# Altium PCB AIRZAI_LID_BD_REVA.PcbDoc (part 1 of 2)
Units mil, origin at the board's own origin, x right, y up, seen from the top; angles counter-clockwise.
Board outline 3392.82 x 2969.83 mil, 4 copper layers (Top, GND, PWR, Bottom), stack 30.709 mil thick; 77 components, 60 nets, 278 pads, 262 vias.
Unrouted connection lines stored in the file: 140.
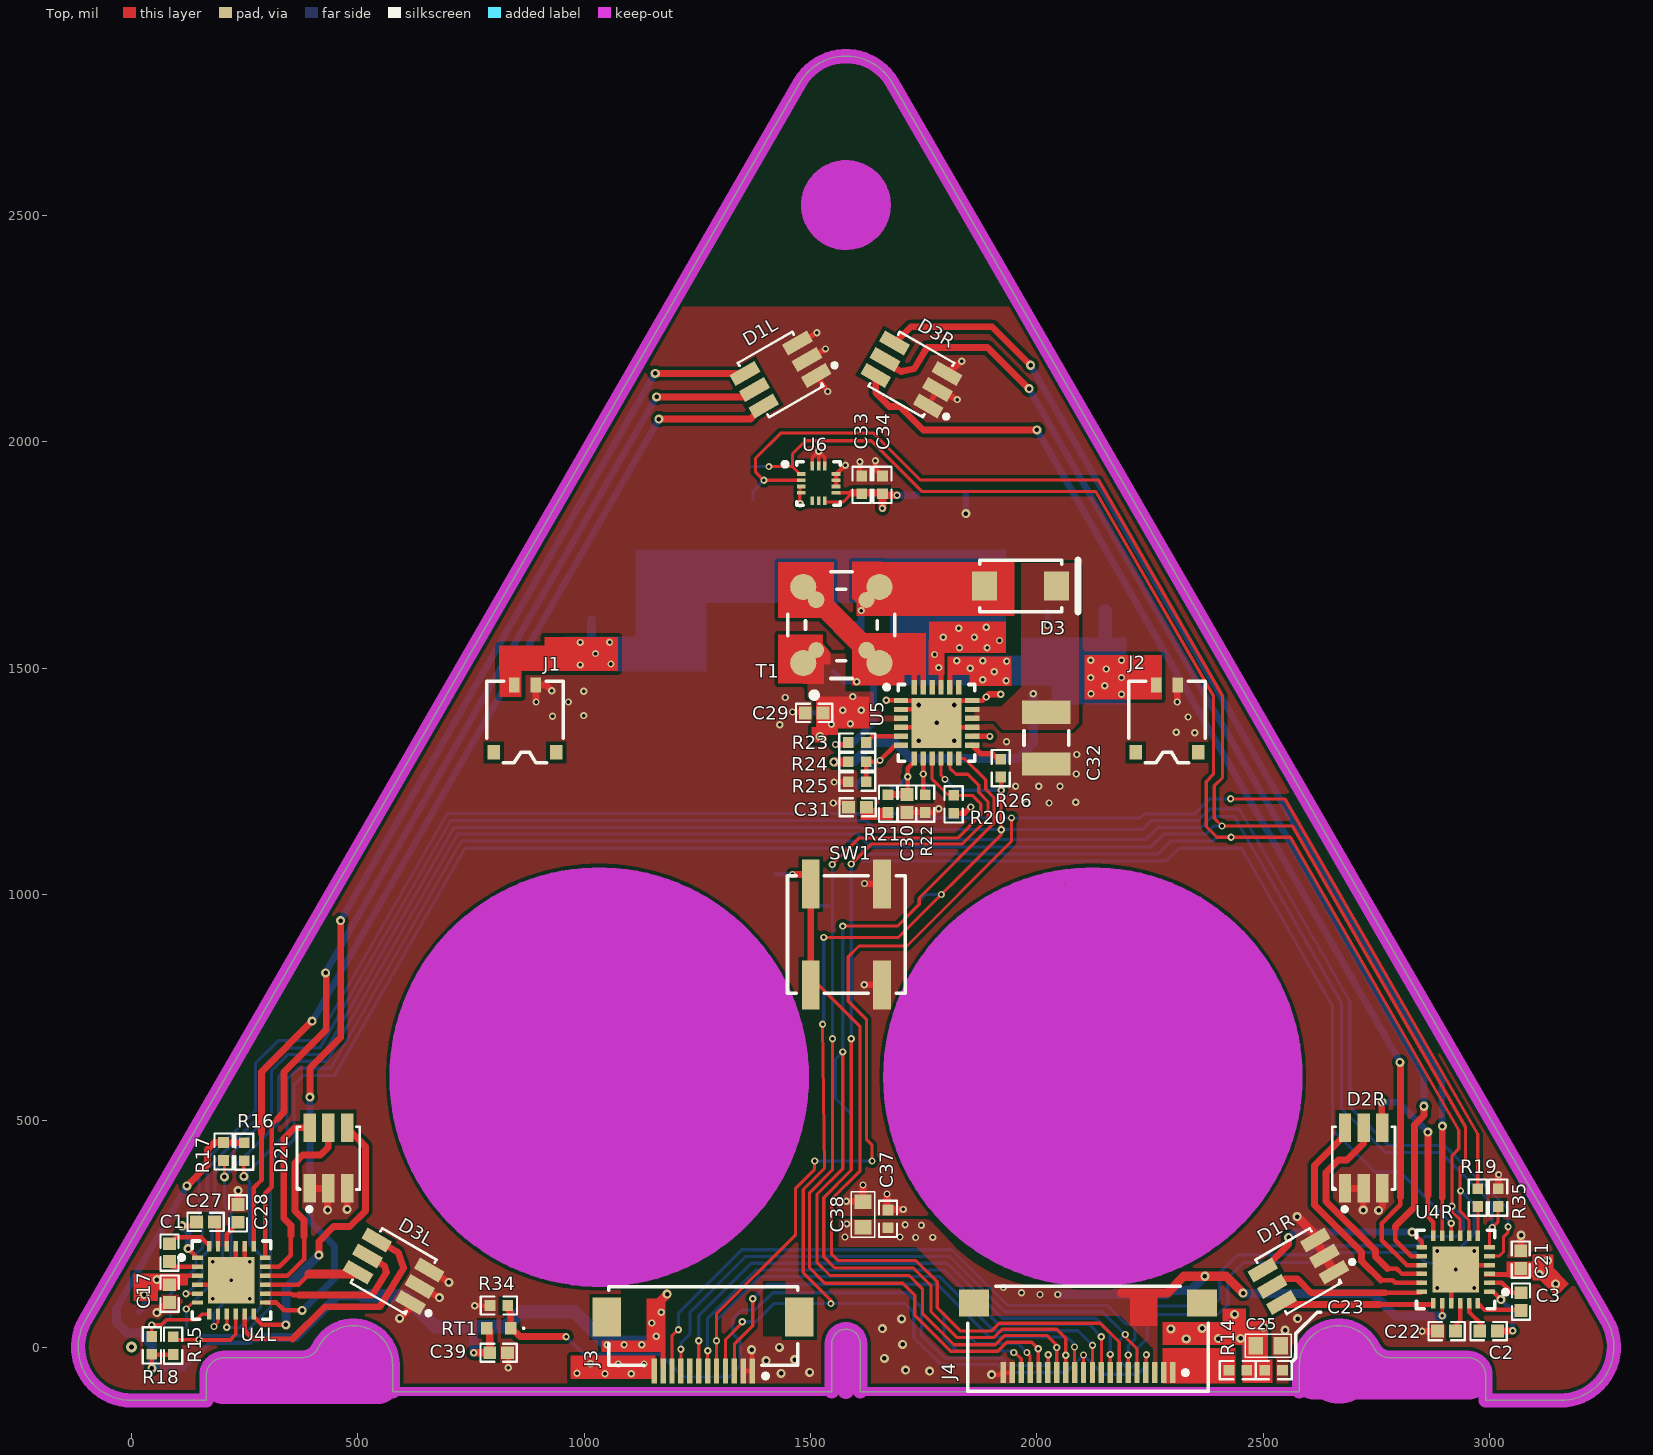
[diagram p0: Top view]
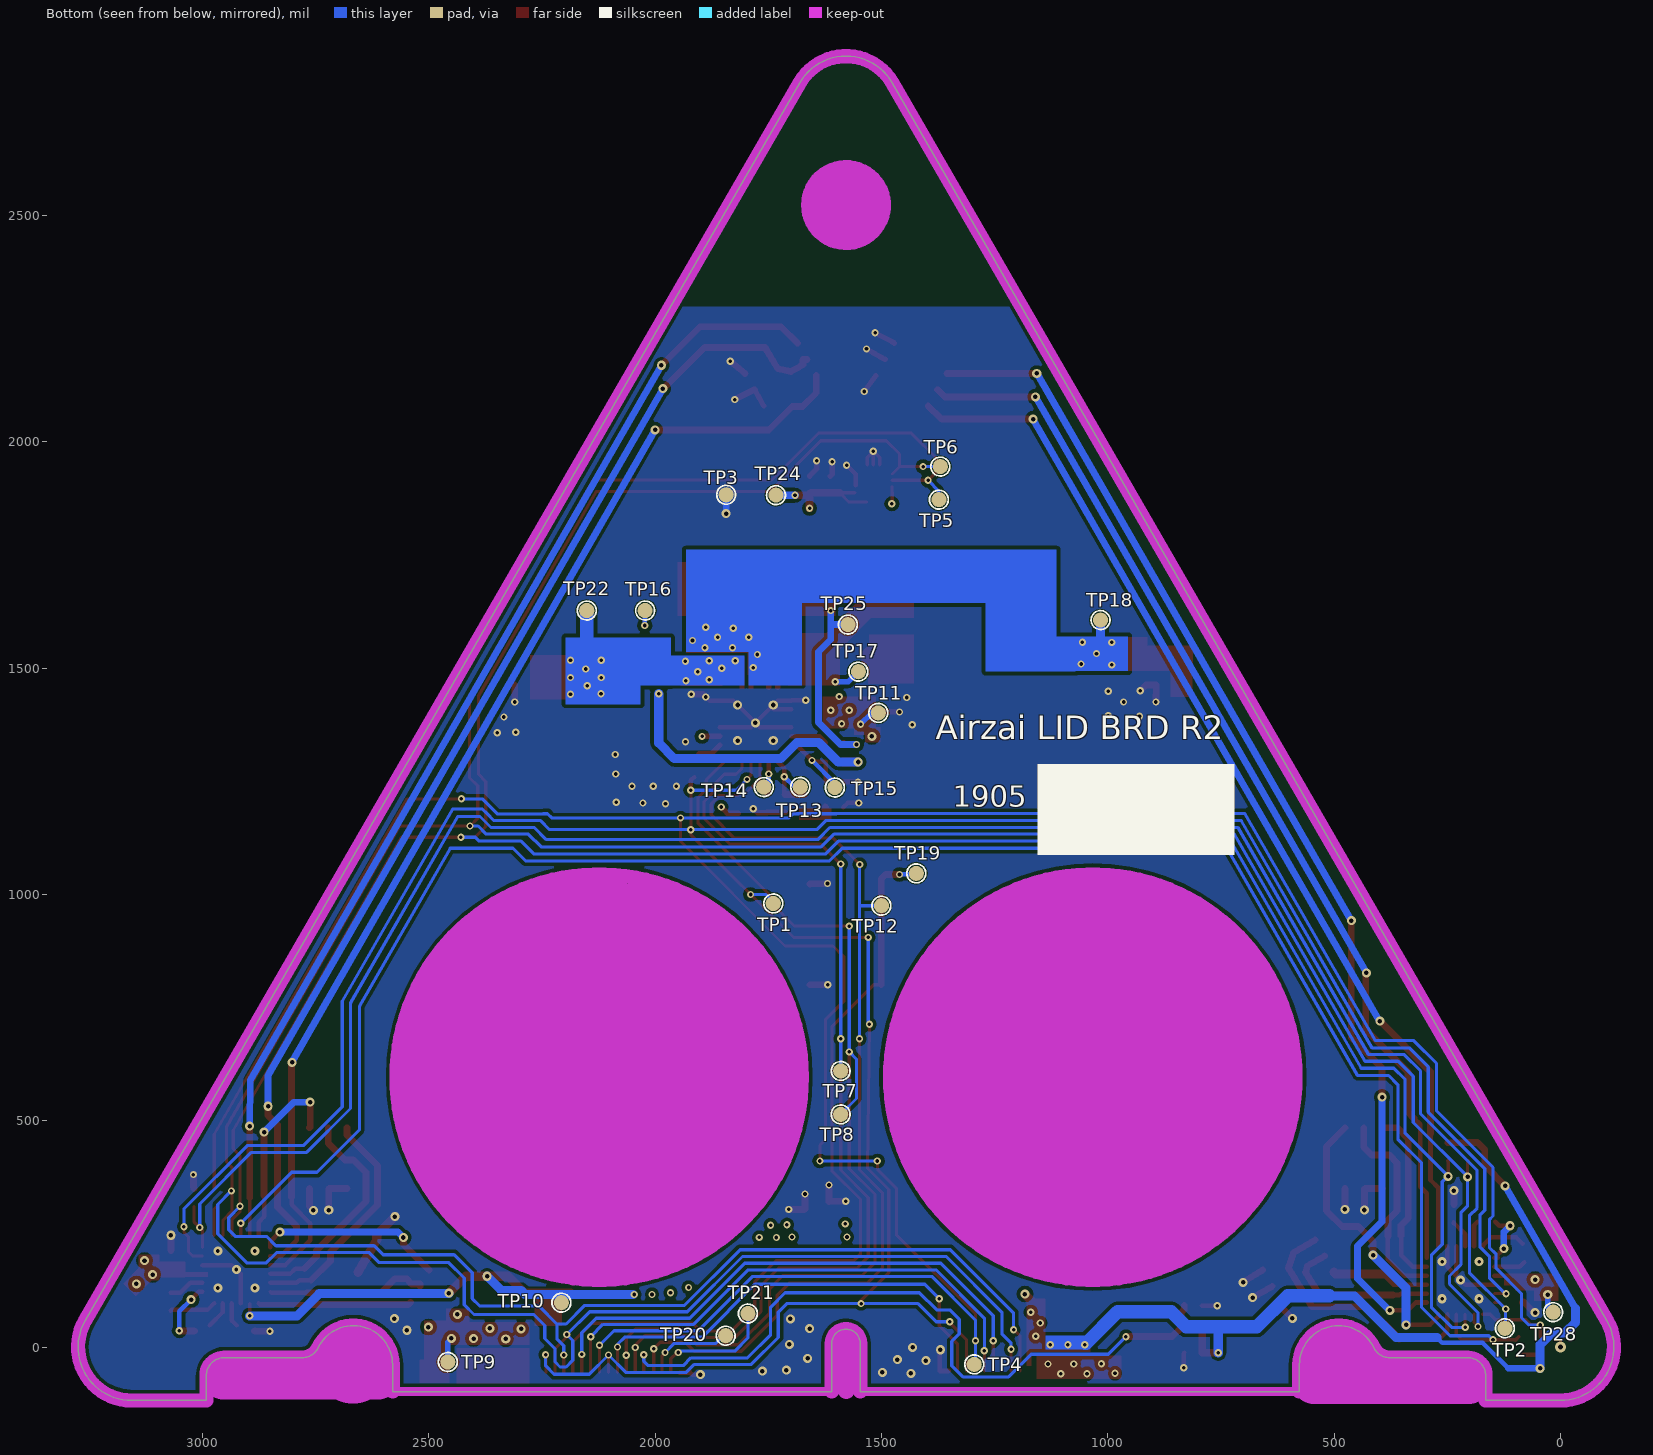
[diagram p1: Bottom view, seen from below]
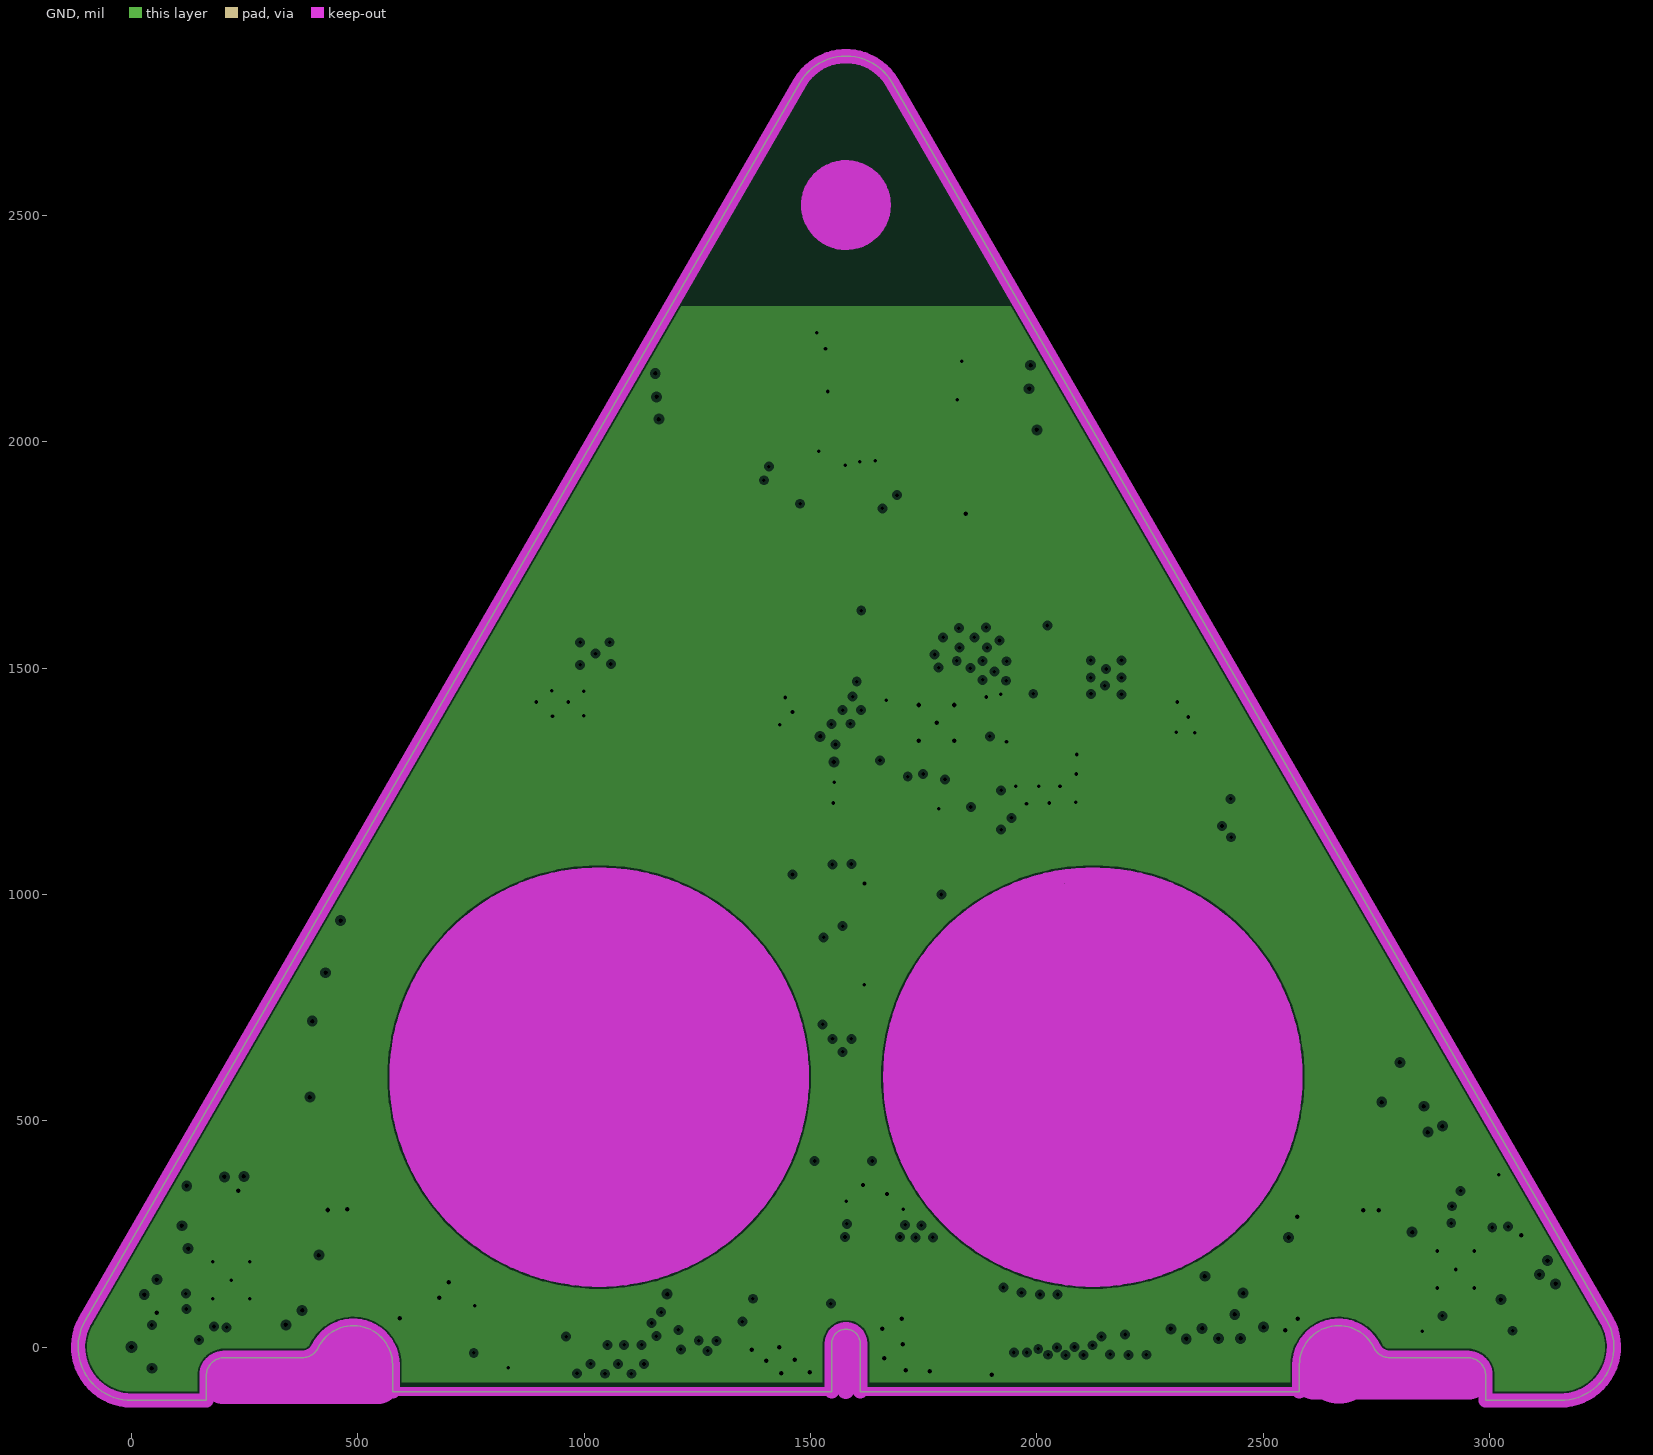
[diagram p2: GND, clearances drawn from the general rule]
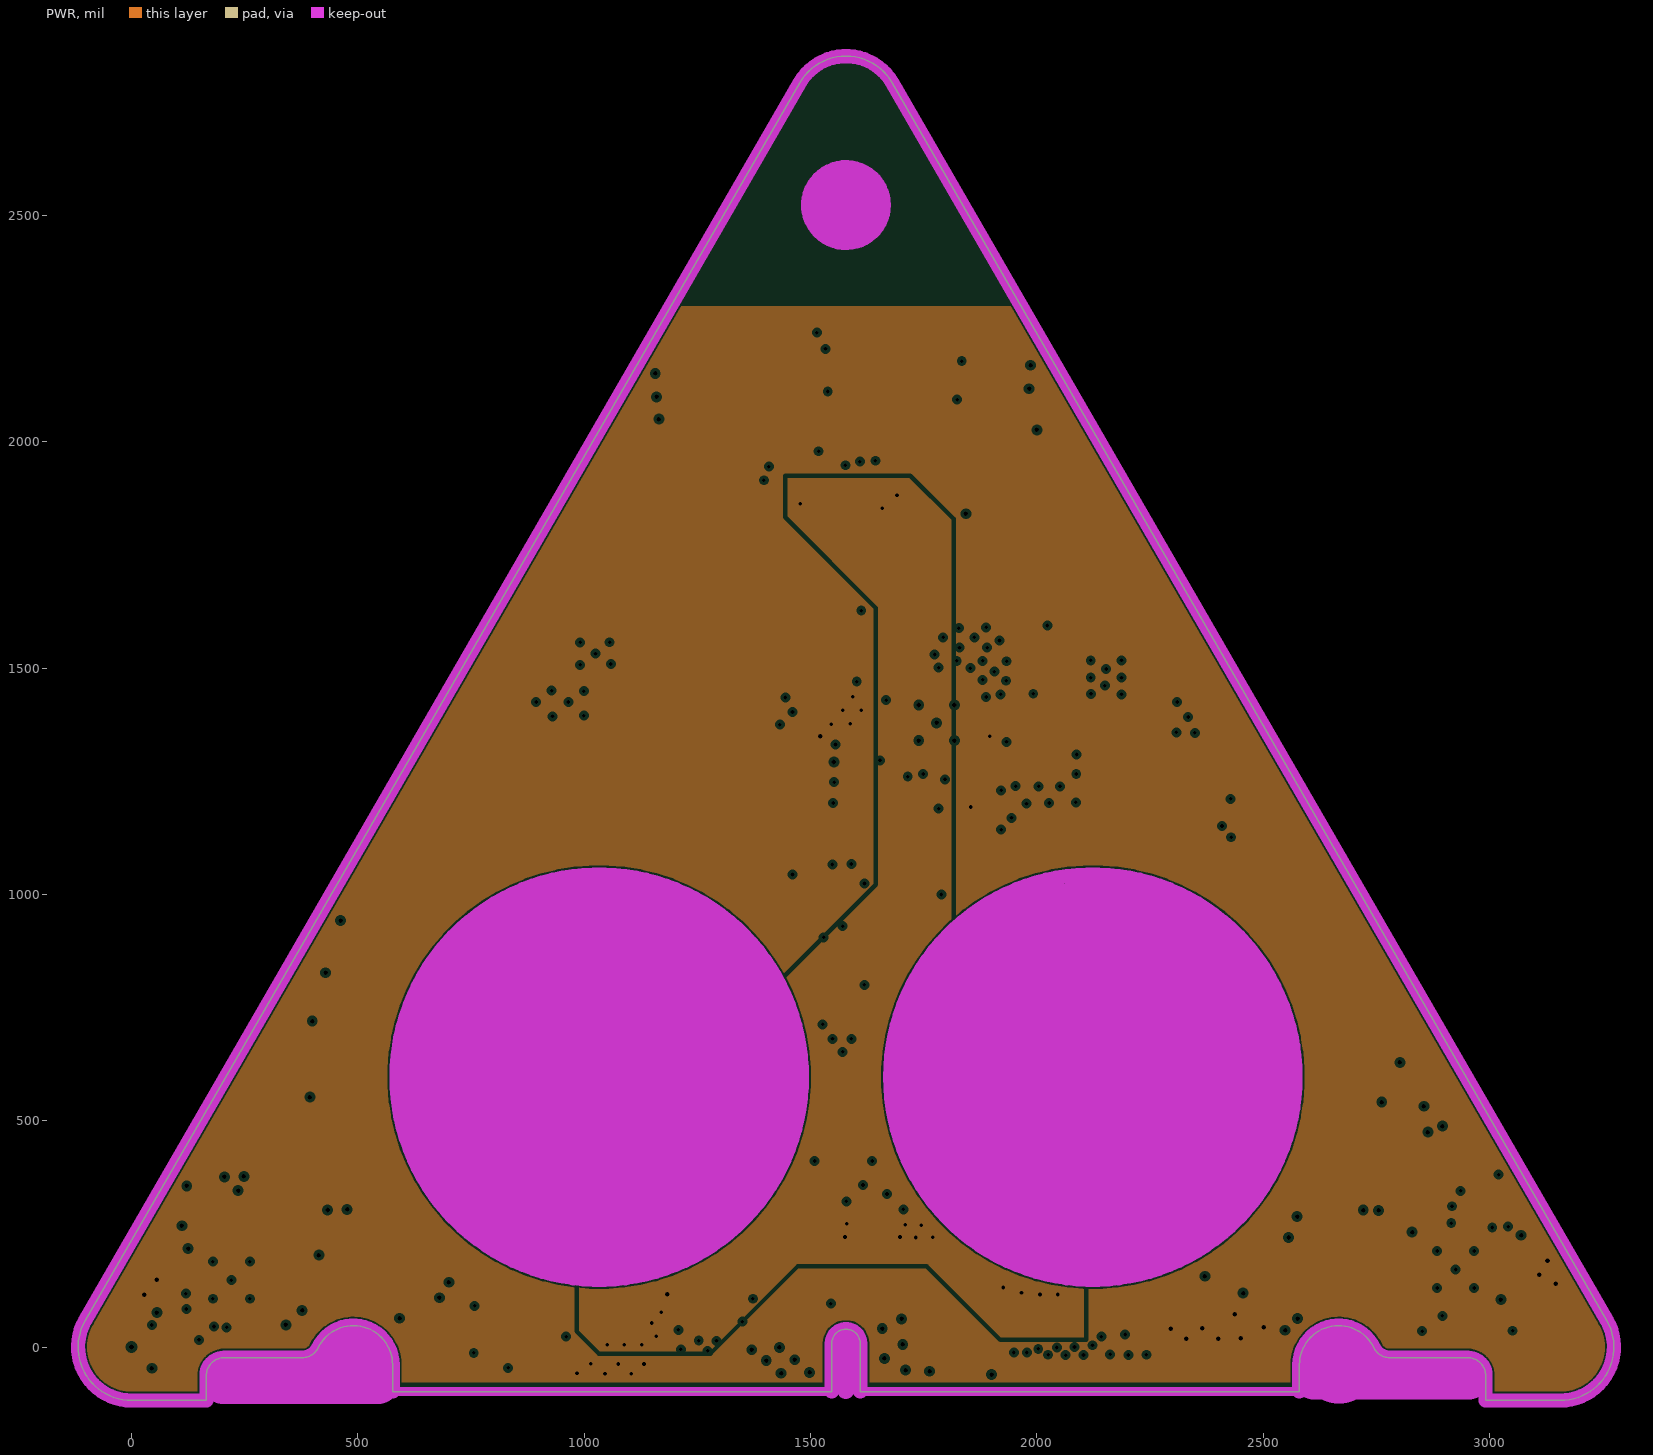
[diagram p3: PWR, clearances drawn from the general rule]
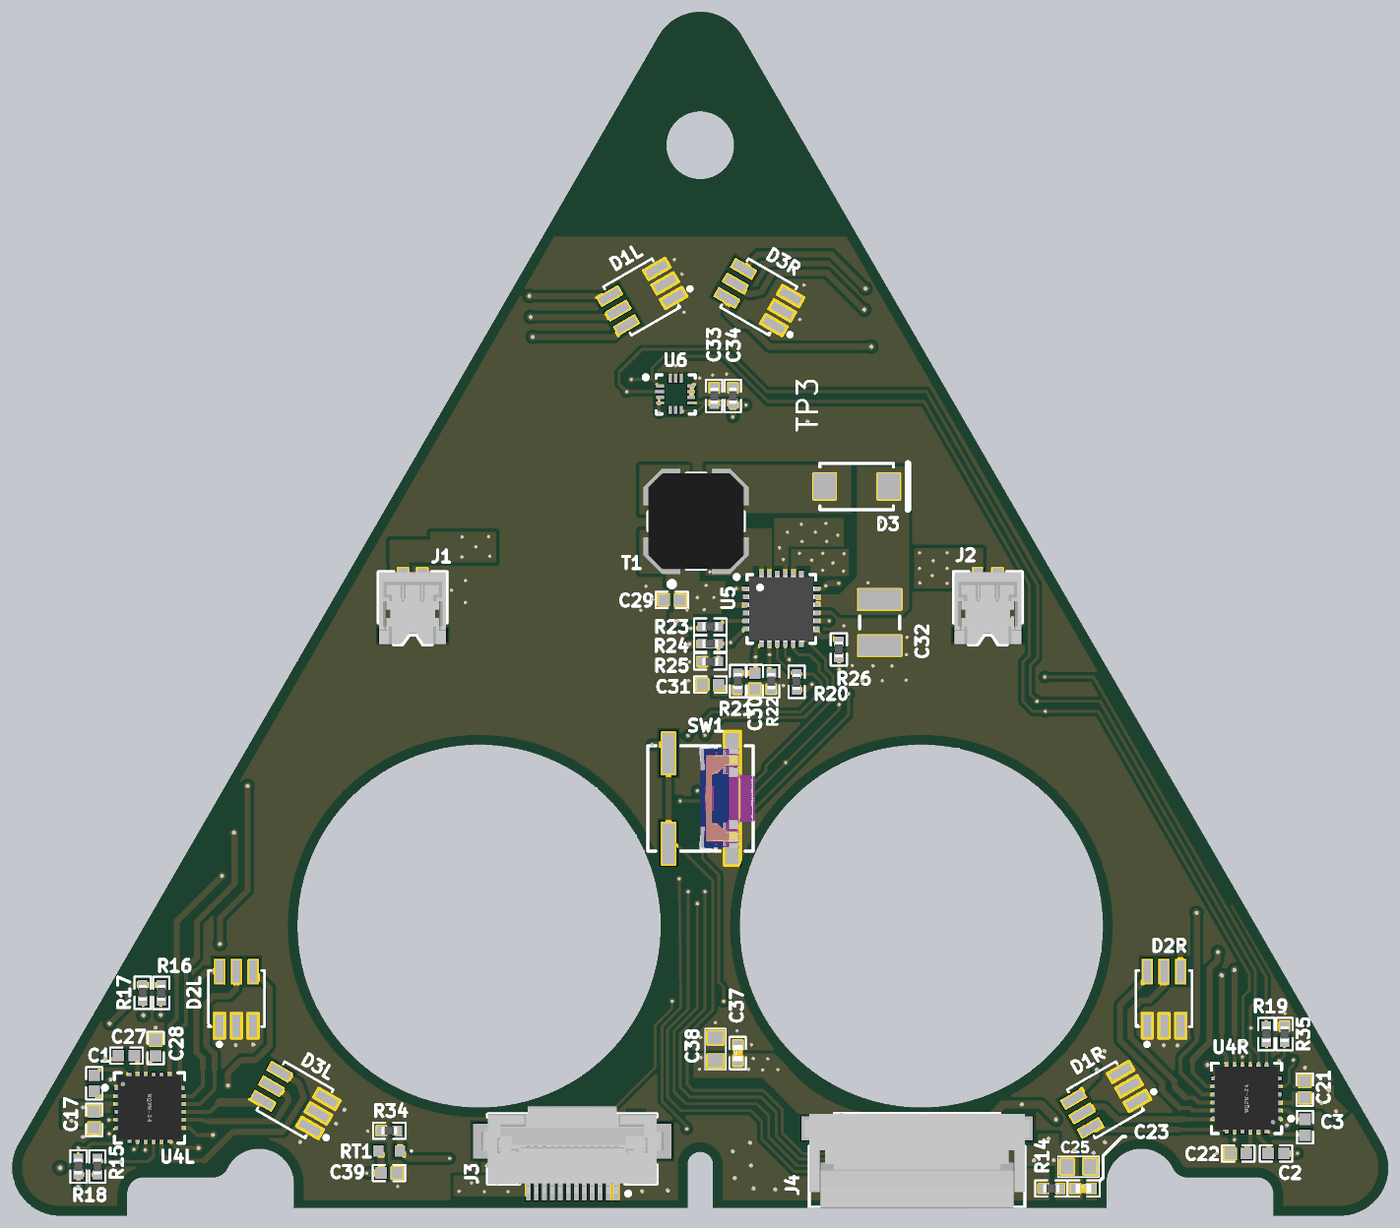
[diagram p5: 3D render of the assembled board from above, using the file's embedded part models]

## Layer stack, top to bottom
Top Solder: solder mask 0.4, Solder Resist, Dk 3.5
Top: signal copper 2.3622
Dielectric1: prepreg 5.1969, FR-4, Dk 4.8
GND: plane copper 2.3622, net GND
Dielectric 2: core 10.8661, Dk 4.2
PWR: plane copper 2.3622, net (Multiple Nets)
Dielectric3: prepreg 5.1969, FR-4, Dk 4.8
Bottom: signal copper 2.3622
Bottom Solder: solder mask 0.4, Solder Resist, Dk 3.5

## Board outline
-0.04,-118.04 165.31,-118.04 165.31,-62.92 cw(c204.68,-62.92) 204.68,-23.55 376.83,-23.55 ccw(c376.83,15.82) 412.23,-1.41 cw(c490.11,-39.3) 576.73,-39.3 576.73,-98.35 1546.8,-98.35 1546.8,7.94 cw(c1578.29,7.94) 1609.79,7.94 1609.79,-98.35 2579.86,-98.35 2579.86,-39.3 cw(c2666.47,-39.3) 2744.36,-1.41 ccw(c2779.76,15.82) 2779.76,-23.55 2951.9,-23.55 cw(c2951.9,-62.92) 2991.27,-62.92 2991.27,-118.04 3156.63,-118.04 ccw(c3156.63,0.07) 3258.91,59.13 1680.58,2792.88 ccw(c1578.29,2733.83) 1476.01,2792.88 -102.33,59.13 ccw(c-0.04,0.07)
cut-out: 1033.02,148.53 cw(c1033.02,596.36) 585.18,596.36 cw(c1033.02,596.36) 1033.02,1044.2 cw(c1033.02,596.36) 1480.85,596.36 cw(c1033.02,596.36)
cut-out: 1675.73,596.36 ccw(c2123.57,596.36) 2123.57,148.53 ccw(c2123.57,596.36) 2571.4,596.36 ccw(c2123.57,596.36) 2123.57,1044.2 ccw(c2123.57,596.36)
cut-out: 1578.29,2439.14 cw(c1578.29,2522.81) 1494.63,2522.81 cw(c1578.29,2522.81) 1578.29,2606.47 cw(c1578.29,2522.81) 1661.95,2522.81 cw(c1578.29,2522.81)

## Design rules (kind name [scope] priority, off if disabled: settings)
Clearance Clearance_gnd_polygon [(InNet('GND') AND InPolygon)] p1: gap=8 ignorepadtopadclearanceinfootprint=TRUE
Clearance [All] p2: gap=6 ignorepadtopadclearanceinfootprint=TRUE
ComponentClearance [All] p1: gap=3.94 collisioncheckmode=3 verticalgap=3.94 showdistances=FALSE
HoleSize HoleSize_1 [All] p1: absolutevalues=TRUE maxlimit=100000 minlimit=3.94 maxpercent=80.000 minpercent=20.000
HoleSize [All] p2: absolutevalues=TRUE maxlimit=100 minlimit=1 maxpercent=80.000 minpercent=20.000
HoleToHoleClearance mdViaViaSameLayer [All] p1: gap=7.87 allowstackedmicrovias=TRUE
HoleToHoleClearance [All] p2: gap=10 allowstackedmicrovias=TRUE
MinimumSolderMaskSliver [All] p1: minsoldermaskwidth=0
PasteMaskExpansion mlMinCreamFrame [All] p1: expansion=0
PasteMaskExpansion [All] p2: expansion=0
PlaneClearance [All] p1: clearance=7
PlaneConnect [All] p1: planeconnectstyle=Relief reliefexpansion=8 reliefentries=4 reliefconductorwidth=10 reliefairgap=7
PolygonConnect ThermalVias [IsVia] p1: connectstyle=Direct reliefconductorwidth=10 reliefentries=4 polygonreliefangle="90 Angle" airgapwidth=10
PolygonConnect [All] p2: connectstyle=Direct reliefconductorwidth=10 reliefentries=4 polygonreliefangle="90 Angle" airgapwidth=10
RoomDefinition "AIRZAI_LID_BD_REVB Sheet1" [InComponentClass('AIRZAI_LID_BD_REVB Sheet1')] p1: confinementstyle=ConfineIn formatcopy=TRUE lockcomponents=FALSE outline -206.69,-375 15084.93,-375 15084.93,3046.26 -206.69,3046.26
RoutingVias [All] p1: holewidth=11.81 width=23.62 viastyle="Through Hole" minholewidth=5.91 minwidth=11.81 maxholewidth=11.81 maxwidth=23.62
SilkToSilkClearance [All] p1 off: silktosilkclearance=0
SilkToSolderMaskClearance [IsPad] p1 off: minsilkscreentomaskgap=10 clearancetoexposedcopper=TRUE
SolderMaskExpansion mlMinStopFrame [All] p1: expansion=2.76
SolderMaskExpansion [All] p2: expansion=2.76
Width [All] p1: maxlimit=1000 minlimit=7 preferedwidth=7
21 further rules are at their usual default settings.

## Components (designator, comment, footprint, x,y, rotation, side; value= is the part's Value field where it differs from the comment)
C1 "0.47µF" CAPC0402(1005)60_M 83.72,208.69 r270 top
C2 "0.47µF" CAPC0402(1005)60_M 2998,35.23 r0 top
C3 "0.47µF" CAPC0402(1005)60_M 3069.57,100.13 r90 top
C17 "1uF  0402" CAPC0402(1005)60_M 83.94,118.11 r90 top value=1µF
C21 "1uF  0402" CAPC0402(1005)60_M 3069,193 r270 top value=1µF
C22 "1uF" CAPC0402(1005)60_M 2905,35.23 r0 top
C23 "0.1µF" 0402CAP 2523,-51 r0 top
C25 "10µF" SM0603_BTD.1SM_H90_WSS 2483,2.66 r0 top
C27 "0.47µF" CAPC0402(1005)60_M 163.39,276.57 r180 top
C28 "1uF 0402" CAPC0402(1005)60_M 235.24,295.28 r270 top value=1uF
C29 "1uF 6.3V" CAPC0402(1005)60_M 1508,1401 r0 top value=1uF
C30 "C390pF" CAPC0402(1005)60_M 1712.74,1200.66 r270 top value=390pF
C31 "C3.9nF" CAPC0402(1005)60_M 1603.76,1192.46 r0 top value=3.9nF
C32 "2.2uF" C1210_N 2020.76,1345.46 r90 top value=2.2µF
C33 "0.1µF" 0402 1612.76,1904.46 r90 top
C34 "2.2µF" 0402 1658.76,1904.46 r270 top
C37 "0.1µF" 0402CAP 1671,283 r90 top
C38 "10µF" SM0603_BTD.1SM_H90_WSS 1615.72,264.78 r90 top
C39 "CAP 100nF 10V 0402(1005)" CAPC0402(1005)60_M 811,-12.71 r180 top value=100nF
D1L "CLX6A-FKB-CK1P1G1BB7D3D3" LED_CLX6A-FKB 1433.98,2148.5 r210 top
D1R "CLX6A-FKB-CK1P1G1BB7D3D3" LED_CLX6A-FKB 2577.68,167.56 r210 top locked
D2L "CLX6A-FKB-CK1P1G1BB7D3D3" LED_CLX6A-FKB 434.61,417.48 r90 top locked
D2R "CLX6A-FKB-CK1P1G1BB7D3D3" LED_CLX6A-FKB 2722.01,417.48 r90 top locked
D3 "STPS2H100A" STM-SMA-2_V 1964,1681 r0 top value="100V 2A"
D3L "CLX6A-FKB-CK1P1G1BB7D3D3" LED_CLX6A-FKB 578.9,167.56 r150 top locked
D3R "CLX6A-FKB-CK1P1G1BB7D3D3" LED_CLX6A-FKB 1722.6,2148.5 r150 top locked
J1 "=Value" CON_78171_0002 845.47,1462.6 r0 top locked
J2 "=Value" CON_78171_0002 2263.78,1462.6 r0 top locked
J3 "52892-1233" MOLX-52892-1233 1262.8,4.08 r180 top locked
J4 "XF2M-2015-1A-R100" OMRON_XF2M-2015-1A_0 2112.91,18.46 r180 top
R14 "0R" 0402 2444,-51 r180 top
R15 "120K" 0402 91.76,3.15 r270 top value="120000.00 Ohm"
R16 "RMCF0402JT4K70" 0402 248.99,431.46 r90 top value=4.7K
R17 "RMCF0402JT4K70" 0402 203.24,432 r90 top value=4.7K
R18 "120K" 0402 44.76,3.46 r270 top value="120000.00 Ohm"
R19 "0R" 0402 2974,330 r90 top
R20 "51K1 1% 0402(1005)" 0402 1816,1199 r270 top value="51100.00 Ohm"
R21 "47K 1%" 0402 1671.25,1200.66 r270 top value="47000.00 Ohm"
R22 "12K 5%" 0402 1753.46,1200.46 r90 top value="12000.00 Ohm"
R23 "20K5" 0402 1603.1,1335.46 r180 top value="20500.00 Ohm"
R24 "560K" 0402 1603.1,1292.89 r180 top value="560000.00 Ohm"
R25 "10K" 0402 1603.1,1249.12 r0 top value="10000.00 Ohm"
R26 "0R" 0402 1920,1278.84 r270 top
R34 "10K 1% 0402(1005)" 0402 811.5,91.64 r0 top value="10000.00 Ohm"
R35 "0R" 0402 3019,330 r90 top
RT1 "NCP18XH103F03RB" MURA-NCP18XH103F03RB-2_V 811,41.33 r180 top value=3455K
SW1 "SKRAALE010" SW_ALPS_SKRAALE010 1578.98,911.42 r90 top locked
T1 "NA5880-AE" COILCRAFT_NA5880-AE_MFG 1567.99,1595.11 r90 top value=3.3uH
TP1 "TESTPOINT" TP_0.9MM 1739,980 r270 bottom
TP2 "TESTPOINT" TP_0.9MM 122.59,41.44 r270 bottom
TP3 "TESTPOINT" TP_0.9MM 1843,1882.81 r270 bottom
TP4 "TESTPOINT" TP_0.9MM 1295,-38.24 r270 bottom
TP5 "TESTPOINT" TP_0.9MM 1373,1872 r270 bottom
TP6 "TESTPOINT" TP_0.9MM 1370,1945 r270 bottom
TP7 "TESTPOINT" TP_0.9MM 1590,610 r90 bottom
TP8 "TESTPOINT" TP_0.9MM 1590,514 r90 bottom
TP9 "TESTPOINT" TP_0.9MM 2458,-33 r90 bottom
TP10 "TESTPOINT" TP_0.9MM 2207,98 r90 bottom
TP11 "TESTPOINT" TP_0.9MM 1507,1401 r90 bottom
TP12 "TESTPOINT" TP_0.9MM 1500,975 r90 bottom
TP13 "TESTPOINT" TP_0.9MM 1679.37,1237.31 r90 bottom
TP14 "TESTPOINT" TP_0.9MM 1760,1237 r90 bottom
TP15 "TESTPOINT" TP_0.9MM 1603,1236 r90 bottom
TP16 "TESTPOINT" TP_0.9MM 2022,1627 r90 bottom
TP17 "TESTPOINT" TP_0.9MM 1551,1492 r90 bottom
TP18 "TESTPOINT" TP_0.9MM 1016,1606 r90 bottom
TP19 "TESTPOINT" TP_0.9MM 1423,1046.46 r90 bottom
TP20 "TESTPOINT" TP_0.9MM 1844,25 r90 bottom
TP21 "TESTPOINT" TP_0.9MM 1795,74 r90 bottom
TP22 "TESTPOINT" TP_0.9MM 2151,1627 r90 bottom
TP24 "TESTPOINT" TP_0.9MM 1733,1882 r90 bottom
TP25 "TESTPOINT" TP_0.9MM 1574,1596 r90 bottom
TP28 "TESTPOINT" TP_0.9MM 16,77 r90 bottom
U4L "LP55231SQE/NOPB" WQFN-24-LP55231SQE/NOPB 220.47,147.64 r0 top value=Value
U4R "LP55231SQE/NOPB" WQFN-24-LP55231SQE/NOPB 2925.2,171.26 r180 top value=Value
U5 "FAN8841MPXCT-ND" WFQFN-24-FAN8841MPX 1778.34,1379.02 r0 top value=FAN8841MPX
U6 "LIS2DHTR" STM-LGA-14_L 1517.76,1908.01 r0 top

## Footprints (in the part's own frame and the unit in brackets; to place one, negate y for a bottom-side part, rotate by r counter-clockwise, add the part's x,y. Pads: shape width x height; smd on the part's side, far side on the other; paste and mask are expansions set on the pad)
0402 [mm] "Chip Resistor, Body 1.1x0.5mm, IPC High Density"
  rect 0.6x0.6 smd: 1(-0.5,0) 2(0.5,0)
  silkscreen extent -1.02,-0.51 1.02,0.51, body extent -0.5,-0.25 0.5,0.25, height 0.27
0402CAP [mm] "Chip Capacitor, Body 1.1x0.5mm, IPC High Density"
  rect 0.6x0.6 smd: 1(-0.5,0) 2(0.5,0)
  silkscreen extent -1.02,-0.51 1.02,0.51, body extent -0.5,-0.3 0.5,0.3, height 0.19
C1210_N [mm] "Chip Capacitor, Body 3.2x2.5mm, IPC Medium Density"
  rect 1.3x2.7 smd: 1(-1.45,0) 2(1.45,0)
  silkscreen extent -0.4,-1.25 0.4,1.25, body extent -1.7,-1.35 1.7,1.35, height 1.5
CAPC0402(1005)60_M [mm] "Chip Capacitor, Body 1.0x0.5mm, Height 0.6mm, IPC Low Density"
  rect 0.72x0.72 smd: 1(-0.5,0) 2(0.5,0)
  silkscreen extent -1.02,-0.51 1.02,0.51, body extent -0.55,-0.3 0.55,0.3, height 0.6
COILCRAFT_NA5880-AE_MFG [mil]
  round 57.62 smd paste-39370.1 mask-39370.1: 1(-84.16,84.15) 2(-84.16,-84.16) 3(84.15,-84.16) 4(84.15,84.15)
  round 35 smd paste+0 mask+0: 1(-55.11,55.38) 3(55.11,-55.38)
  round 36.8 smd paste+0 mask+0: 2(-55.68,-55.65) 4(55.68,55.65)
  Top region: -39.37,129.92 -83.66,129.92 -129.92,83.66 -129.92,39.37 -82.68,39.37 -39.37,82.67
  Top region: 39.37,129.92 83.66,129.92 129.92,83.66 129.92,39.37 82.67,39.37 39.37,82.67
  Top region: -39.37,-129.92 -83.66,-129.92 -129.92,-83.66 -129.92,-39.37 -82.68,-39.37 -39.37,-82.68
  Top region: 39.37,-129.92 83.66,-129.92 129.92,-83.66 129.92,-39.37 82.67,-39.37 39.37,-82.68
  Top region: 24.61,86.61 51.38,86.61 86.61,55.91 86.61,24.61 59.84,24.61 24.61,55.91 24.61,86.61
  Top region: 86.61,-24.61 86.61,-51.38 51.38,-86.61 24.61,-86.61 24.61,-55.91 59.84,-24.61 86.61,-24.61
  Top region: -24.61,-86.61 -51.38,-86.61 -86.61,-55.91 -86.61,-24.61 -59.84,-24.61 -24.61,-55.91 -24.61,-86.61
  Top region: -86.61,24.61 -86.61,51.38 -51.38,86.61 -24.61,86.61 -24.61,55.91 -59.84,24.61 -86.61,24.61
  silkscreen extent -160,-118 118,118, body extent -134,-134 134,134, height 10
CON_78171_0002 [mm] "1.55 MATED HT"
  rect 0.7x0.8 smd mask+0.1: 0(-1.15,-3.775) 0(2.35,-3.775)
  rect 0.6x0.85 smd mask+0.1: 1(0,0) 2(1.2,0)
  silkscreen extent -1.55,-4.37 2.75,0.2, body extent -1.5,-4.33 2.7,0.2, height 1.44
LED_CLX6A-FKB [mm] "CREE LED 3 IN 1"
  rect 1.6x0.7 smd paste-0.1 mask+0.07: 1(-1.7,1.05) 2(-1.7,0) 3(-1.7,-1.05) 4(1.7,-1.05) 5(1.7,0) 6(1.7,1.05)
  silkscreen extent -2.98,-1.76 1.76,1.76, body extent -1.8,-1.75 1.8,1.76, height 2.9
MOLX-52892-1233 [mm] "FPC Connector, 12-Leads, Right Angle, Pitch 0.5 mm, Mated Height 2.0 mm, SMT"
  rect 0.3x1.4 smd: 1(-2.75,1.448) 2(-2.25,1.448) 3(-1.75,1.448) 4(-1.25,1.448) 5(-0.75,1.448) 6(-0.25,1.448) 7(0.25,1.448) 8(0.75,1.448) 9(1.25,1.448) 10(1.75,1.448) 11(2.25,1.448) 12(2.75,1.448)
  rect 1.6x2.2 smd: MP1(-5.4,-1.575) MP2(5.4,-1.575)
  silkscreen extent -5.3,-3.28 5.3,1.85, body extent -5.7,-3.77 5.7,1.73, height 2.05
MURA-NCP18XH103F03RB-2_V [mm] "Chip, 2-Leads, Body 1.6x0.8mm"
  rect 0.65x0.7 smd: 1(-0.675,0) 2(0.675,0)
  silkscreen extent -1.45,-0.05 -1.35,0.05, body extent -0.8,-0.4 0.8,0.4, height 0.8
OMRON_XF2M-2015-1A_0 [mm]
  rect 0.3x1.2 smd paste+0: 1(-4.75,1.9) 2(-4.25,1.9) 3(-3.75,1.9) 4(-3.25,1.9) 5(-2.75,1.9) 6(-2.25,1.9) 7(-1.75,1.9) 8(-1.25,1.9) 9(-0.75,1.9) 10(-0.25,1.9) 11(0.25,1.9) 12(0.75,1.9) 13(1.25,1.9) 14(1.75,1.9) 15(2.25,1.9) 16(2.75,1.9) 17(3.25,1.9) 18(3.75,1.9) 19(4.25,1.9) 20(4.75,1.9)
  rect 1.7x1.5 smd paste+0: MP1(-6.4,-2) MP2(6.4,-2)
  silkscreen extent -6.75,-2.95 6.75,2.95, body extent -7.05,-2.92 7.05,2.98, height 2
SM0603_BTD.1SM_H90_WSS [mil]
  rect 32x38 smd mask+4: 1(0,0) 2(56,0)
  silkscreen extent -23,-26 79,26, body extent -4,-17 59,17, height 35
STM-LGA-14_L [mm] "LGA, 14-Leads, Body 2.15x2.15mm, Pitch 0.35mm, IPC High Density"
  rect 0.5x0.2 smd mask+0.07: 1(-0.974,0.525) 2(-0.974,0.175) 3(-0.974,-0.175) 4(-0.974,-0.525) 8(0.974,-0.525) 9(0.974,-0.175) 10(0.974,0.175) 11(0.974,0.525)
  rect 0.2x0.5 smd mask+0.07: 5(-0.35,-0.974) 6(0,-0.974) 7(0.35,-0.974) 12(0.35,0.974) 13(0,0.974) 14(-0.35,0.974)
  silkscreen extent -2,-1.22 1.22,1.23, body extent -1.08,-1.07 1.07,1.08, height 1
STM-SMA-2_V [mm] "Diode, 2-Leads, Body 4.6x2.9mm"
  rect 1.4x1.64 smd: 1(-2.015,0) 2(2.015,0)
  silkscreen extent -2.3,-1.45 3.21,1.45, body extent -2.3,-1.45 2.3,1.45, height 2.71
SW_ALPS_SKRAALE010 [mm] "6.2MM SQ 2.9RD ACT"
  rect 2.75x1 smd paste-0.1 mask+0.102: 1(-2.825,2) 1(2.825,2) 2(-2.825,-2) 2(2.825,-2)
  silkscreen extent -3.3,-3.3 3.3,3.3, body extent -3.4,-3.21 3.4,3.22, height 3.48
TP_0.9MM [mm] "0.9MM DIA TESTPOINT"
  round 0.85 smd paste-5 mask+0.05: 1(0,0)
  silkscreen extent -0.53,-0.53 0.53,0.53
WFQFN-24-FAN8841MPX [mm]
  rect 0.8x0.3 smd mask+0.07: 1(-2,1.25) 2(-2,0.75) 3(-2,0.25) 4(-2,-0.25) 5(-2,-0.75) 6(-2,-1.25) 13(2,-1.25) 14(2,-0.75) 15(2,-0.25) 16(2,0.25) 17(2,0.75) 18(2,1.25)
  rect 0.3x0.8 smd mask+0.07: 7(-1.25,-2) 8(-0.75,-2) 9(-0.25,-2) 10(0.25,-2) 11(0.75,-2) 12(1.25,-2) 19(1.25,2) 20(0.75,2) 21(0.25,2) 22(-0.25,2) 23(-0.75,2) 24(-1.25,2)
  rect 2.8x2.8 smd: 25(0,0)
  silkscreen extent -2.92,-2.15 2.15,2.15, body extent -2.05,-2.05 2.05,2.05, height 0.8
WQFN-24-LP55231SQE/NOPB [mm] "QFN, 24-Leads, Body 3.97x3.97mm, Pitch 0.50mm, Thermal Pad 2.60x2.60mm, IPC Medium Density"
  rect 0.6x0.25 smd: 1(-1.9,1.25) 2(-1.9,0.75) 3(-1.9,0.25) 4(-1.9,-0.25) 5(-1.9,-0.75) 6(-1.9,-1.25) 13(1.9,-1.25) 14(1.9,-0.75) 15(1.9,-0.25) 16(1.9,0.25) 17(1.9,0.75) 18(1.9,1.25)
  rect 0.25x0.6 smd: 7(-1.25,-1.9) 8(-0.75,-1.9) 9(-0.25,-1.9) 10(0.25,-1.9) 11(0.75,-1.9) 12(1.25,-1.9) 19(1.25,1.9) 20(0.75,1.9) 21(0.25,1.9) 22(-0.25,1.9) 23(-0.75,1.9) 24(-1.25,1.9)
  rect 2.6x2.6 smd: 25(0,0)
  silkscreen extent -2.92,-2.2 2.2,2.2, body extent -2.01,-2.01 2.01,2.01, height 0.8

## Part data
C1 C2 C3 C27: library part CAP, "CAP 0.47uF 25V ±10% 0402 (1005 Metric) Thickness 0.6mm SMD", Case-EIA=0402, Case-Metric=1005, Manufacturer="TDK Corporation", Manufacturer Part Number=C1005X5R1E474K050BB, Rated Voltage="16 V", Supplier Part Number 1=445-8020-6-ND, Tolerance=±10%, Max Thickness="0.6 mm", Note="25V ±10%  X5R", Supplier 1=Digi-Key, Technology=SMT
C17 C21: library part CAP, "CAP 1uF 16V ±10% 0402 (1005 Metric) Thickness 0.6mm SMD", Case-EIA=0402, Case-Metric=1005, Manufacturer=KEMET, Manufacturer Part Number=GRM155R61A105KE15D, Rated Voltage="16 V", Supplier Part Number 1=399-7765-1-ND, Tolerance=±10%, Max Thickness="0.6 mm", Supplier 1=Digi-Key, Technology=SMT
C22 C28: library part CAP, "CAP 1uF 16V ±10% 0402 (1005 Metric) Thickness 0.6mm SMD", Case-EIA=0402, Case-Metric=1005, Manufacturer=MURATA, Manufacturer Part Number=GRM155R61A105KE15D, Rated Voltage="10 V", Supplier Part Number 1=490-3890-6-ND, Tolerance=±10%, Max Thickness="0.6 mm", Note="10V  ±10% X5R", Supplier 1=Digi-Key, Technology=SMT
C23 C33 C37: library part C0402-100n, "Capacitor, X7R, ±10%", Case-EIA=0402, Case-Metric=1005, Manufacturer=TDK, Manufacturer Part Number=C1005X7R1C104K, Rated Voltage="16 V", Supplier Part Number 1=445-4952-2-ND, Tolerance=±10%, Note="16V ±10% X7R", Pin Count=2, Supplier 1=Digi-Key, Technology=SMT
  C23: Max Thickness=0.6mm
  C33 C37: Max Thickness="0.6 mm"
C25: library part C0402-100n, "6.3volts X5R 20%", Case-EIA=0603, Case-Metric=1608, Manufacturer=MURATA, Manufacturer Part Number=GRM188R60J106ME47D, Rated Voltage="6.3 V", Supplier Part Number 1=490-3896-6-ND, Tolerance=±10%, Max Thickness="0.9 mm", Note="6.3volts X5R 20%", Supplier 1=Digi-Key, Technology=SMT
C29: library part CAP, "CAP 1uF 6.3V ±10% 0402 (1005 Metric) Thickness 0.6mm SMD", Case-EIA=0402, Case-Metric=1005, Manufacturer=MURATA, Manufacturer Part Number=GRM155R61A105KE15D, Rated Voltage="10 V", Supplier Part Number 1=490-3890-6-ND, Tolerance=±10%, Max Thickness="0.6 mm", Supplier 1=Digi-Key, Technology=SMT
C30: library part CAP, "CAP 390pF 50V ±20% 0402 (1005 Metric) Thickness 0.6mm SMD", Case-EIA=0402, Case-Metric=1005, Manufacturer=KEMET, Manufacturer Part Number=C0402C391K5RACTU, Rated Voltage="50 V", Supplier Part Number 1=399-7792-6-ND, Tolerance=±20%, Max Thickness="0.6 mm", Supplier 1=Digi-Key, Technology=SMT
C31: library part CAP, "CAP 3.9nF 50V ±10% 0402 (1005 Metric) Thickness 0.6mm SMD", Case-EIA=0402, Case-Metric=1005, Manufacturer=TDK, Manufacturer Part Number=C2012C0G1H392J060AA, Rated Voltage="50 V", Supplier Part Number 1=445-7510-1-ND, Tolerance=±10%, Max Thickness="0.6 mm", Supplier 1=Digi-Key, Technology=SMT
C32: library part C3225JB2A225K230, "Imported", Case-EIA=1210, Case-Metric=3225, Manufacturer=TDK, Manufacturer_Part_Number=C3225JB2A225K230AB, Rated Voltage="100 V", Supplier Part Number 1=445-11868-2-ND, Tolerance=±10%, Built_By=EMA_UL_Team, C="Copyright (C) 2015 Accelerated Designs. All rights reserved", Manufacturer Part Number=C3225JB2A225K230AB, RefDes=RefDes, Supplier 1=Digi-Key, Technology=SMT, Type=DEV, Vendor=TDK
C34: library part "C0603-1µ0 X7R", "Capacitor, X7R, ±10%", Case-EIA=0402, Case-Metric=1005, Manufacturer=TDK, Manufacturer Part Number=C1005X5R0J225M, Rated Voltage="6.3 V", Supplier Part Number 1=445-4999-2-ND, Tolerance=±10%, Max Thickness="0.6 mm", Note="6.3V ±20% X5R", Supplier 1=Digi-Key, Technology=SMT
C38: library part C0402-100n, "Capacitor, X7R, ±10%", Case-EIA=0603, Case-Metric=1608, Manufacturer=MURATA, Manufacturer Part Number=GRM188R60J106ME47D, Rated Voltage="6.3 V", Supplier Part Number 1=490-3896-6-ND, Tolerance=±10%, Max Thickness="0.9 mm", Note="6.3volts X5R 20%", Supplier 1=Digi-Key, Technology=SMT
C39: library part CAP, "CAP 100nF 10V ±10% 0402 (1005 Metric) Thickness 0.6mm SMD", Case-EIA=0402, Case-Metric=1005, Manufacturer=Yageo, Manufacturer Part Number=CC0402ZRY5V8BB104, Rated Voltage="25 V", Supplier Part Number 1=311-1375-6-ND, Tolerance=±10%, Max Thickness="0.6 mm", Supplier 1=Digi-Key, Technology=SMT
D1L D1R D2L D2R D3L D3R: library part LED_CLX6A-FKB-CK1P1G1BB7D3D3, Case-EIA="6-SMD, J-Lead", Manufacturer=CREE, Rated Voltage="2V, 3.2V, 3.2V", Supplier Part Number 1=CLX6A-FKB-CK1P1G1BB7D3D3CT-ND, Manufacturer Part Number=CLX6A-FKB-CK1P1G1BB7D3D3, Supplier 1=Digi-Key, Technology=SMT
D3: library part DSKY-AK-2, "Power Schottky Rectifier, 2 A, 100 V, 2-Pin SMD (SMA), RoHS, Tape and Reel", Capacitance @ Vr, F=-, Case-EIA="DO-214AC, SMA", Current - Average Rectified (Io)=2A, Current - Reverse Leakage @ Vr=1µA@100V, Manufacturer=STMicroelectronics, Operating Temperature - Junction=175°C(Max), Package / Case=DO-214AC,SMA, Package Description="2-Pin Surface Mount Device, Body 4.275 x 2.575 mm", Package Reference=SMA, Rated Voltage="100 V", Standard Package=1, Supplier Device Package=SMA(DO-214AC), Supplier Part Number 1=497-3758-6-ND, Voltage - DC Reverse (Vr) (Max)=100V, Voltage - Forward (Vf) (Max) @ If=790mV@2A, Category=DiscreteSemiconductorProducts, Datasheet URL=http://www.st.com/content/ccc/resource/technical/document/datasheet/0a/8b/df/ef/15/72/4f/38/CD00001548.pdf/files/CD00001548.pdf/jcr:content/translations/en.CD00001548.pdf, Datasheet Version=06/2013, Diode Type=Schottky, Family=Diodes,Rectifiers-Single, Manufacturer Part Number=STPS2H100A, Manufacturer URL=http://www.st.com/, Mounting Technology=SurfaceMount, Mounting Type=SurfaceMount, Online Catalog=SchottkyDiode, Other Names=497-3758-6, Other Related Documents=STPS2H100ViewAllSpecifications, Package URL=http://www.st.com/st-web-ui/static/active/en/resource/technical/document/datasheet/CD00283518.pdf, Packaging=Digi-Reel®, Reverse Recovery Time (trr)=-, Series=-, Speed=FastRecovery=200mA(Io), Supplier 1=Digi-Key, Technology=SMT
J1 J2: library part CONN_BM02B_SURS_TF, Manufacturer=MOLEX, Manufacturer Part Number=781710002, Supplier Part Number 1=WM4459TR-ND, Supplier 1=Digi-Key, Technology=SMT
J3: library part MOLX-52892-1233, "0.5 mm Pitch Easy-On(TM) Type FPC Connector, 2.0 mm Mated Height, Right Angle, ZIF, SMT, Bottom Contact, 12 Circuits, -40 to 85 degC, ELV and RoHS Compliant, Tape and Reel", Current (Max per Contact)=0.5A, Manufacturer=MOLEX, Manufacturer Part Number=0528921233, Supplier Part Number 1=WM11084TR-ND, Voltage (Max)=50V, Circuits (Loaded)=12, ComponentLink1Description="Manufacturer URL", ComponentLink1URL=http://www.molex.com/molex/index.jsp, ComponentLink2Description=Datasheet, ComponentLink2URL=http://www.molex.com/webdocs/datasheets/pdf/en-us/0528921233_FFC_FPC_CONNECTORS.pdf, ComponentLink3Description="Package Specification", ComponentLink3URL=http://www.molex.com/pdm_docs/sd/528921233_sd.pdf, Contact Position=Bottom, Durability (mating cycles max)=20, Entry Angle="90degrees Angle", Mated Height=2.00mm, Material - Metal="Phosphor Bronze", Material - Plating Mating="Silver, Tin-Bismuth", Material - Plating Termination="Silver, Tin-Bismuth", Max Thickness="0.6 mm", Mounting Technology="Surface Mount", Number of Rows=1, Orientation="Right Angle", PackageDescription="12-Lead FPC Connector, Pitch 0.5 mm", PackageReference=52892-1233, PackageVersion="Rev. A, 05/2013", Packing="Tape and Reel", PartNumber=52892-1233, PCB Locator=No, PCB Retention=Yes, Pitch - Mating Interface=0.50mm, Pitch - Termination Interface=0.50mm, Polarized to PCB=No, RoHS=TRUE, Stackable=No, Supplier 1=Digi-Key, Technology=SMT
J4: Manufacturer="OMRON ELECTRONIC COMPONENTS", Supplier Part Number 1=Z5253-ND, ComponentLink1Description="Manufacturer URL", ComponentLink1URL=http://www.molex.com/molex/index.jsp, ComponentLink2URL=http://www.molex.com/webdocs/datasheets/pdf/en-us/0528922033_FFC_FPC_CONNECTORS.pdf, ComponentLink3Description="Package Specification", ComponentLink3URL=http://www.molex.com/pdm_docs/sd/528922033_sd.pdf, Manufacturer Part Number=XF2M-2015-1A-R100, Stock 1=0, Supplier 1=Digikey
R14: library part R0402-12k, "Resistor, ±1%, 0.063W", Case-EIA=0402, Case-Metric=1005, Manufacturer=Panasonic, Manufacturer Part Number=ERJ-2GE0R00X, Supplier Part Number 1=P0.0JTR-ND, Tolerance=±5%, Max Thickness=0.6mm, Note="0.1W JUMPER", Pin Count=2, Supplier 1=Digi-Key, Technology=SMT
R15 R18: library part RES, "120K 0.063W 1% 0402 (1005 Metric)  SMD", Case-EIA=0402, Case-Metric=1005, Manufacturer=Yageo, Manufacturer Part Number=RC0402JR-07120KL, Power="0.063 W", Supplier Part Number 1=311-120KJRTR-ND, Tolerance=5%, Max Thickness="0.6 mm", Supplier 1=Digi-Key, Technology=SMT
R16 R17: library part RES-2, "Chip Resistor, 4.7 KOhm, +/- 5%, 0.063 W, -55 to 155 degC, 0402 (1005 Metric), RoHS, Tape and Reel", Case-EIA=0402, Case-Metric=1005, Manufacturer=Stackpole-Electronics-Inc., Operating Temperature=-55°C~155°C, Package / Case=0402(1005Metric), Package Description="2-Pin Surface Mount Device, Body 1 x 0.5 mm", Power (Watts)=0.063W,1/16W, Resistance (Ohms)=4.7k, Supplier Part Number 1=RMCF0402JT4K70TR-ND, Temperature Coefficient=±100ppm/°C, Tolerance=±5%, Category=Resistors, Composition=ThickFilm, Datasheet URL=https://www.seielect.com/Catalog/SEI-RMCF_RMCP.pdf, Datasheet Version=01/2017, Family=ChipResistor-SurfaceMount, Features=AutomotiveAEC-Q200, Manufacturer Part Number=RMCF0402JT4K70, Manufacturer URL=https://www.seielect.com/, Max Thickness="0.6 mm", Mounting Technology=SurfaceMount, Number of Terminations=2, Package Reference=0402, Packaging=Digi-Reel®, Series=RMCF, Supplier 1=Digi-Key, Supplier Device Package=0402, Technology=SMT
R19 R26 R35: library part R0402-12k, "Resistor, ±1%, 0.063W", Case-EIA=0402, Case-Metric=1005, Manufacturer=Panasonic, Manufacturer Part Number=ERJ-2GE0R00X, Supplier Part Number 1=P0.0JTR-ND, Tolerance="5 %", Max Thickness="0.6 mm", Note="0.1W JUMPER", Pin Count=2, Supplier 1=Digi-Key, Technology=SMT
R20: library part RES, "51K1 0.063W 1% 0402 (1005 Metric)  SMD", Case-EIA=0402, Case-Metric=1005, Manufacturer="Vishay Dale", Manufacturer Part Number=CRCW040251K1FKED, Power="0.063 W", Supplier Part Number 1=541-51.1KLDKR-ND, Tolerance="1 %", Max Thickness="0.6 mm", Supplier 1=Digi-Key, Technology=SMT
R21: library part RES, "47K 0.063W 1% 0402 (1005 Metric)  SMD", Case-EIA=0402, Case-Metric=1005, Manufacturer=panasonic, Manufacturer Part Number=ERJ-2RKF4702X, Power="0.063 W", Supplier Part Number 1=P47.0KLTR-ND, Tolerance="1 %", Max Thickness="0.6 mm", Supplier 1=Digi-Key, Technology=SMT
R22: library part RES, "12K 0.063W 5% 0402 (1005 Metric)  SMD", Case-EIA=0402, Case-Metric=1005, Manufacturer=Yageo, Manufacturer Part Number=RC0402JR-0712KL, Power="0.063 W", Supplier Part Number 1=311-12KJRTR-ND, Tolerance="5 %", Max Thickness="0.6 mm", Supplier 1=Digi-Key, Technology=SMT
R23: library part RES, "20K5 0.063W 1% 0402 (1005 Metric)  SMD", Case-EIA=0402, Case-Metric=1005, Manufacturer="Vishay Dale", Manufacturer Part Number=CRCW040220K5FKED, Power="0.063 W", Supplier Part Number 1=541-20.5KLDKR-ND, Tolerance="1 %", Max Thickness="0.6 mm", Supplier 1=Digi-Key, Technology=SMT
R24: library part RES, "560K 0.063W 1% 0402 (1005 Metric)  SMD", Case-EIA=0402, Case-Metric=1005, Manufacturer="Vishay Dale", Manufacturer Part Number=CRCW0402560KFKED, Power="0.063 W", Supplier Part Number 1=541-560KLDKR-ND, Tolerance="1 %", Max Thickness="0.6 mm", Supplier 1=Digi-Key, Technology=SMT
R25: library part RES, "10K 0.063W 5% 0402 (1005 Metric)  SMD", Case-EIA=0402, Case-Metric=1005, Manufacturer="Vishay Dale", Manufacturer Part Number=CRCW040210K0JNED, Power="0.063 W", Supplier Part Number 1=541-10KJCT-ND, Tolerance="5 %", Max Thickness="0.6 mm", Supplier 1=Digi-Key, Technology=SMT
R34: library part RES, "10K 0.063W 1% 0402 (1005 Metric)  SMD", Case-EIA=0402, Case-Metric=1005, Manufacturer=Susumu, Manufacturer Part Number=RR0510P-103-D, Power="0.063 W", Supplier Part Number 1=RR05P10.0KDTR-ND, Tolerance="1 %", Max Thickness="0.6 mm", Supplier 1=Digi-Key, Technology=SMT
RT1: library part MURA-NCP18XH103F03RB-2, "NTC Thermistor, 10 KOhm, +/- 1%, 0.1 W, -40 to 125 degC, 0603 (1608 Metric), RoHS, Tape and Reel", Case-EIA=0603, Case-Metric=1608, Manufacturer=Murata, Rated Current=310A, Resistance=10kO, Supplier Part Number 1=490-4800-2-ND, Temperature Range=-40to+125degC, Tolerance="1 %", Tolerance (%)=±1%, B-constant=3434K, Datasheet URL=http://www.jameco.com/Jameco/Products/ProdDS/1870999.pdf, Datasheet Version=Apr-05, Manufacturer Part Number=NCP18XH103F03RB, Manufacturer URL=http://www.murata.com/, Max Thickness="0.6 mm", Supplier 1=Digi-Key, Technology=SMT, Type=NTC
SW1: library part SW_SKRAALE010, Manufacturer=ALPS, Manufacturer Part Number=SKRAAKE010
T1: library part TRANS-DOT-1-1-4, "Power Inductor and Transformer, 9.6 / 38.42 uH, +/- 20%, 3.4 / 1.7 A, -40 to 85 degC, 4-Pin SMD, RoHS, Tape and Reel", Case-EIA=3.9mmx3.9mm, Inductance - Parallel=3.3uH, Manufacturer=CoilCraft, Maximum DC Current=1.3A, Maximum DC Resistance=19mOhms, Operating Temperature Range=-40Cto+85C, Package Description="4-Pin Surface Mount Device, Body 11.43 x 11.43 mm", Tolerance=20%, Brand=CoilCraft, Core Material=AmorphousMetal, Datasheet URL=https://www.coilcraft.com/pdfs/na5880.pdf, Datasheet Version=03/2007, Height=6.35mm, Inductance - Series=3.3uH, Length=13.97mm, Manufacturer Part Number=NA5880-AE, Manufacturer URL=www.coilcraft.com, Max Thickness=1.1mm, Mounting Style=SMD/SMT, Mounting Technology=SurfaceMount, Packaging=Reel, Product=PowerInductors, Product Category=CoupledInductors, RoHS=True, Series=CTX4,4P,4A, Supplier 1=CoilCraft, Supplier Part Number 1=NA5880-AE, Termination Style=SMD/SMT, Tradename=OCTA-PAC, Type=InductorsandTransformers, Unit Weight=0.112000oz, Width=13.97mm
U4L U4R: "Imported", Case-EIA="24-WQFN (4x4)", Manufacturer="Texas Instruments", Rated Voltage=5.5V, Supplier Part Number 1=296-39059-1-ND, Built_By=EMA_UL_Team, C="Copyright (C) 2016 Accelerated Designs. All rights reserved", Manufacturer_Part_Number=LP55231SQE/NOPB, Manufacturer Part Number=LP55231SQE/NOPB, RefDes=RefDes, Supplier 1=Digi-Key, Supplier 2=Digi-Key, Supplier Part Number 2=LP55231SQE/NOPB-ND, Technology=SMT, Type=DEV, Vendor="Texas Instruments"
U5: "IC PIEZO ACTUATOR DVR 24MLP", Case-EIA=24-WFQFN, Manufacturer="ON Semiconductor", Manufacturer Part Number=FAN8841MPX, Supplier 1=Digi-Key, Supplier Part Number 1=FAN8841MPXCT-ND, Technology=SMT
U6: library part LIS2DH, Case-EIA=14-VFLGA, Manufacturer=ST, Supplier Part Number 1=497-13795-2-ND, Manufacturer Part Number=LIS2DHTR, Supplier 1=Digi-Key, Technology=SMT

## Via types
v1: diameter 16, hole 8, Top to Bottom, tented both sides, 175 vias
v2: diameter 20, hole 10, Top to Bottom, tented both sides, 71 vias
v3: diameter 20, hole 8, Top to Bottom, 10 vias
v4: diameter 20, hole 10, Top to Bottom, 5 vias
v5: diameter 23.62, hole 11.81, Top to Bottom, tented both sides, 1 vias

## Nets (pads, with @x,y where several pads share a name; then routed paths per layer and width w, separated by ;. In a path a pad name is that pad's centre, name@x,y a point inside that pad or via, vN(x,y) a via of type N, cw(c..) or ccw(c..) an arc to the next point about the centre after c; other vN are vias at no path point)
3V3: C33.1 C34.2 C37.1 C38.1 C39.2 J3.11 J4.3 R15.2 R16.2 R17.2 R18.2 RT1.2 TP10.1 TP24.1 U4R.20 U6.3 U6.4 U6.7 U6.8 | length 3537.2
  Top w7: U6.4@1476.42,1887.34 U6.3@1476.42,1901.12 ; U6.7@1531.54,1866.67 1571.75,1866.67 1592.42,1887.34 U6.8@1559.09,1887.34 ; v1(2895.67,69) U4R.20@2895.67,96.46
  Top w8: U6.4@1476.42,1887.34 1476.42,1863.58 v1(1477,1863)
  Top w10: v2(44.76,-47) R18.2@44.76,-16.22 45.07,-16.54 R15.2@91.76,-16.54
  Top w15: v2(122,356) 167,401 167,435 183.69,451.69 R17.2@203.24,451.69 203.77,451.15 R16.2@248.99,451.15
  Top w17: v1(755.88,-12.71) C39.2@791.31,-12.71 791.31,34.44 RT1.2@784.43,41.33 ; 1592.42,1887.34 1656.2,1887.34 C34.2@1658.76,1884.78 ; v1(1658.74,1852.89) C34.2@1658.74,1884.76 ; v1(1691,1882) 1661.54,1882 C34.2@1658.76,1884.78
  Top w20: 1156,90 v2(1183,117) ; 2187.03,119.06 2287.62,119.06 2324.9,156.34 v2(2371.3,156.34) 2418.16,156.34 v2(2455.5,119)
  Bottom w10: 115.4,-47 171.4,9 261,9 273,21
  Bottom w15: -33.78,85.02 v2(122,356) v2@122.41,356.71 ; v2(44.76,-47) 115.4,-47 ; v1@2046,115.83 v1@2048.42,115.83
  Bottom w17: v1(1691,1882) TP24.1@1733,1882
  Bottom w20: -33.78,85.02 -33.78,54.78 -10,31 19,31 44.76,5.24 v2(44.76,-47) ; 273,21 363,21 455,113 511,113 ; 754,44.82 755.88,42.94 v1(755.88,-12.71) ; v1@2048.42,115.83 2048.58,116 2287,116 2296,125 2339.96,125 v2(2371.3,156.34) ; v2@2455,118 2742,118 2791,69 v1(2895.67,69)
  Bottom w30: 511,113 602.64,113 670.82,44.82 754,44.82 826.82,44.82 859.76,77.76 978.24,77.76 1047.5,8.5 v1@1051,8.5
  other v1: 1051,5 1088,5 1127,5 1159.36,24 1149,53 1170,77 2007,116 2046,116 1966,120 1926,131.44 1732,242 1770,242.14 1576,243 1697.65,243 1744.87,269 1708.9,270 1580,272
+5: C17.2 C21.2 C23.1 C25.1 C29.2 J3.12 R14.1 R20.2 T1.1 TP9.1 TP11.1 TP28.1 U4L.3 U4R.3 U5.3 U5.14 | length 261.1
  Top w10: 118.11,153 122.59,157.48 U4L.3@145.67,157.48
  Top w12: R20.2@1816,1179.31 1840.34,1179.31 v1(1854,1192.98) ; U5.14@1857.08,1349.49 1895.73,1349.49 v1(1896.22,1349)
  Bottom w12: TP28.1@16,77 28,89 v2(28,116) ; TP11.1@1507,1401 1521,1401 v1(1546,1376) ; v2(2450,19) 2458,11 TP9.1@2458,-33
  other v1: 1046,-59 1104,-59 984,-58 1014,-37 1075,-37.4 1132,-37.4 1588,1377 1571,1407 1611.76,1407 1593,1437
  other v2: 2330,18 2401,18.51 2296,40 2365,41 2501,44 2437,72 3146,139.48 56,149 3110,160 3128,191.06 1521,1349
ADC_CH0: J4.15 R34.2 RT1.1 | length 1606.3
  Top w7: J4.15@2024.33,-56.34 2025,-55.67 v1(2025,-17)
  Top w15: R34.2@831.18,91.64 831.18,82.71 837.69,76.2 RT1.1@837.69,41.44 ; RT1.1@837.57,41.33 RT1.1@837.69,41.44 ; v1(960,23) 858.03,23 838.64,42.39 RT1.1@837.69,41.44
  Bottom w7: v1(960,23) 999,-16 1169,-16 1219,-66 1320,-66 1344.5,-41.5 1344.5,12.5 1328,29 1328,61 1349,82 1378.17,82 1416.17,120 1713,120 1744.87,88.13 1744.87,27.13 1796,-24 1921,-24 1938,-41 2015,-41 2025,-31 v1(2025,-17)
CLK: R35.1 TP2.1 U4L.6 U4R.6 | length 4434.6
  Top w7: v1(121,84) 135.43,98.43 U4L.6@145.67,98.43 ; U4R.6@3000,220.47 3000,258 v1(3006,264) 3019,277 R35.1@3019,310.32
  Bottom w7: TP2.1@122.59,41.44 121,43.03 v1(121,84) 201,164 201,290 184,307 184,390 309,515 309,610 345,646 424,646 712.44,1147.75 1614,1147.75 1640.75,1121 2240.29,1121 2267,1147.71 2362.55,1147.75 2386.8,1172 2436,1172 2672.88,759.93 2673,759.82 2673,527 2770,430 2892,430 3006,316 v1(3006,264)
EN: J3.4 J4.4 J4.11 R26.2 TP1.1 U4L.5 U4R.5 U5.10 | length 7386.9
  Top w7: v1(120.08,118) 120.19,118.11 U4L.5@145.67,118.11 ; J3.4@1312.01,-52.93 1312.01,16.11 1349.29,53.4 v1(1349.29,56) ; v1(1526.54,713) 1530.49,394.49 1484,348 1484,164.55 1545,103.55 v1(1545,96) ; v1(1529,905) 1694.22,905 1921,1131.78 v1(1921,1230) ; U5.10@1788.18,1300.28 1788.18,1262.82 v1(1797,1254) ; v1(2103,-17.7) 2103,-56.27 J4.11@2103.07,-56.34 ; J4.4@2240.87,-56.34 2240.87,-16.71 2241.16,-17 v1(2242,-17) ; U4R.5@3000,200.79 3020.79,200.79 3031,211 3031,244 3041,254 v1(3041,266)
  Top w10: R26.2@1914,1259.16 1921,1252.16 v1(1921,1230)
  Bottom w7: v1(120.08,118) 122,118 157,153 157,200.52 178,221.52 178,291 167,302 167,394 292,519 292,619 334,661 416.56,661 705,1162.75 1611,1162.87 1623.13,1162.87 1643,1143 2233.31,1143 2253,1162.69 ; v1(1349.29,56) 1379,56 1419,96 v1(1545,96) 1709,96 1728,77 1728,20.97 1787.21,-38.24 1913.24,-38.24 1931,-56 2064.7,-56 v1(2103,-17.7) 2145.3,-60 2223.39,-60 2242,-41.39 v1(2242,-17) ; v1(1526.54,713) 1529,715.46 v1(1529,905) ; TP1.1@1739,980 1739,983.66 1755.12,999.78 v1(1789,999.78) ; v1(1797,1254) 1821,1230 v1(1921,1230) ; 2253,1162.96 2355.98,1162.97 2370.89,1177.89 2381.57,1188.57 2446.93,1188.57 2691,764 2691,531 2777,445 2901,445 3041,305 v1(3041,266)
  other v1: 1921,1143
FO: J4.16 R20.1 TP12.1 U5.9 | length 2212.1
  Top w7: v1(1548,1066) 1606.43,1124.43 1824.75,1124.43 1876.15,1175.83 1876.15,1200.03 1857.5,1218.69 R20.1@1816,1218.69 ; v1(1548.53,681) 1548.53,391.53 1498,341 1498,174.55 1531.55,141 1703.54,141 1730,114.54 1730,70.06 1809.3,-9.24 1913.76,-9.24 1933.49,10.49 1988.48,10.49 v1(2003,-4.03) 2003,-54.69 J4.16@2004.65,-56.34 ; U5.9@1768.5,1300.28 1768.5,1254.62 1802.46,1220.65 R20.1@1818,1220.65
  Bottom w7: TP12.1@1498.12,975 1548.53,975 ; v1(1548.53,681) 1548.53,975 ; v1@1548.53,1066 1548.53,975
GND: C17.1 C21.1 C22.1 C23.2 C25.2 C28.1 C29.1 C30.2 C31.1 C32.1 C33.2 C34.1 C37.2 C38.2 C39.1 D1L.1 D1L.2 D1L.3 D1R.1 D1R.2 D1R.3 D2L.1 D2L.2 D2L.3 D2R.1 D2R.2 D2R.3 D3L.1 D3L.2 D3L.3 D3R.1 D3R.2 D3R.3 J1.2 J2.2 J3.1 J3.2 J4.19 J4.20 R22.1 R25.1 R34.1 R35.2 SW1.2 TP3.1 U4L.4 U4L.20 U4L.21 U4L.25 U4R.4 U4R.21 U4R.25 U5.1 U5.2 U5.4 U5.15 U5.18 U5.25 U6.9 U6.10 U6.11 U6.12 U6.13 U6.14 | length 2882.9
  Top w8: U6.14@1503.98,1949.35 1503.98,1964.98 v1@1517.76,1978.76 ; U6.13@1517.76,1949.35 v1@1517.76,1978.76 ; U6.12@1531.54,1949.35 1531.54,1964.98 v1@1517.76,1978.76
  Top w10: U4L.4@145.67,137.8 210.63,137.8 v3(220.47,147.64) U4L.25@230.31,157.48 ; U4L.21@230.31,222.44 U4L.25@230.31,157.48 ; U4L.20@250,222.44 250,177.17 U4L.25@230.31,157.48 ; v1(758,91) 791.17,91 R34.1@791.81,91.64 ; C39.1@830.68,-12.71 832,-14.02 v1(832,-46) ; J3.2@1351.38,-52.93 1370.94,-52.93 1371,-52.87 J3.1@1371.06,-52.93 1371.06,-7.06 1367.56,-3.56 1370,-1.13 v2(1370,-6) ; v1(1550,1202) 1574.54,1202 C31.1@1584.07,1192.46 ; U6.9@1557.19,1904 1557.19,1928.68 1559.09,1930.09 v1(1577,1948) ; v1(1667,1429) 1698.83,1429 U5.1@1699.6,1428.23 1729.13,1428.23 v4(1738.97,1418.39) v4(1778.34,1379.02) ; U5.4@1699.6,1369.17 1768.5,1369.17 v4(1778.34,1379.02) ; U5.2@1699.6,1408.54 U5.25@1738.97,1408.54 ; U5.15@1857.08,1369.17 1788.18,1369.17 v4(1778.34,1379.02) ; v1(1888,1436) 1880.23,1428.23 U5.18@1857.08,1428.23 1827.55,1428.23 v4(1817.71,1418.39) v4(1778.34,1379.02) ; v2(1900,-61) 1917.96,-61 1923.96,-55 1924.1,-55.14 J4.20@1925.91,-53.34 ; J4.20@1925.91,-56.34 J4.19@1945.59,-56.34 ; U4R.21@2915.35,96.46 2915.35,161.42 v3(2925.2,171.26) 2935.04,181.1 U4R.4@3000,181.1 ; C21.1@3069,212.69 C21.1@3069.57,213.25
  Top w12: v1(1460,1403) 1491.87,1403 C29.1@1492.31,1402.55 ; D1L.3@1471.27,2217.77 v1(1514,2240.9) ; D1L.2@1491.94,2181.97 v1(1533,2205) ; D1L.1@1512.61,2146.17 v1(1537.94,2111) ; v1(1552,1248) 1553.12,1249.12 R25.1@1583.42,1249.12 ; v1(1609,1956) 1609,1927.91 C33.2@1612.76,1924.15 ; v1(1643.28,1958) 1643.28,1940.12 1659,1924.39 C34.1@1658.76,1924.15 ; C30.2@1712.74,1180.98 1753.26,1180.98 R22.1@1753.46,1180.78 1773.43,1180.78 1782,1189.35 v1(1783,1189.35) ; D3R.1@1759.89,2079.24 D3R.2@1780.56,2115.04
  Top w15: v2(56,76) 57.96,76 82.17,100.2 C17.1@83.94,98.43 ; C28.1@235.24,314.96 v2(235.24,345.46) ; D2L.1@393.27,350.55 431.39,350.55 433,348.95 v2(433,302.78) ; D2L.3@475.94,350.55 D2L.3@475.94,350.55 v2(476,304) ; v2(592,63.54) 616.19,87.73 D3L.1@616.19,98.29 ; D3L.2@636.86,134.09 v2(680,109) ; D3L.3@657.53,169.89 v2(701,143) ; v1(893.72,1425) J1.2@892.72,1462.6 915.4,1462.6 v1(928,1450) ; v1(1579,322) 1614.5,322 C38.2@1615.72,320.78 v1(1615.72,358) ; v1(1618.76,800.2) SW1.2@1657.72,800.2 ; v1(1619.15,1024) SW1.2@1657.72,1022.64 ; v1(1669,338) 1669,304.69 1669.69,304 v1(1705,304) ; D3R.2@1780.56,2115.04 v1(1824,2093.03) ; D3R.3@1801.23,2150.84 v1(1834,2178) ; v1(1888,1436) 1894,1442 v1(1920,1442) ; v1(2310,1425) 2310,1461.57 J2.2@2311.02,1462.6 ; D2R.1@2680.67,350.55 2719.99,350.55 2721,349.54 v2(2721,302.54) ; v2(2755,302) 2763.35,310.35 D2R.3@2763.35,350.55 ; v1(2851,35) 2883.54,35 2884.54,36 C22.1@2885.31,35.23 ; R35.2@3019,349.69 3018,350.69 3020,352.69 v1(3020,381) ; C21.1@3069.57,213.25 v2(3069.57,247)
  Top w20: v2(2575,288) 2614.97,248.03 D1R.3@2614.97,236.82 D1R.2@2635.64,201.02 D1R.1@2656.31,165.22
  Bottom w15: v2(1843,1841) TP3.1@1843,1882.81
  other v1: 1977,1200.46 2027,1202 2086,1203.46 1953,1239 2004,1238.66 2051,1238.66 2087,1266 2088,1309 1932.73,1337 2348.9,1357 2308,1358 1432,1375 2334,1392 930,1393.46 999,1395 965,1425 1444.35,1435 999,1449 1518,1979
  other v2: 1435,-58 1498,-56 1763,-53.34 1709.82,-51 1402,-30 1465,-28 1663,-25 1431,-0.75 1703.54,5.74 2548.49,37.04 1658.46,40.82 1701,62 2576,63
  other v3: 179.53,106.69 261.42,106.69 2884.25,130.32 2966.14,130.32 179.53,188.58 261.42,188.58 2884.25,212.2 2966.14,212.2
  other v4: 1738.97,1339.65 1817.71,1339.65
INT: J3.5 J4.10 R18.1 R19.2 TP4.1 U4L.7 | length 7202.4
  Top w7: J3.5@1292.32,-52.93 v1(1292.32,13.81) 1292.32,73.22 1467,247.89 1467,351 1509,393 v1(1509,411) ; v1(1636,411) 1636,445.5 1623.83,457.67 1623.83,723.17 1583.34,763.66 1583.34,862.34 1607,886 1713,886 1944,1117 v1(1944,1169) ; J4.10@2122.76,-56.34 v1(2122.76,4) ; v1(2428,1211.01) 2548.02,1211.01 2974,470 R19.2@2974,349.69
  Top w8: R18.1@44.76,23.15 v1(44.76,48.76) 65.76,48.76 77,60 143.29,60 156.13,72.83 U4L.7@171.26,72.83
  Bottom w7: v1(44.76,48.76) 69.71,48.76 86,65.05 86,118 142,174 142,205 157,220 157,281.39 149,289.39 149,397 273.71,521.71 273.71,626.71 324,677 408.97,677 697.41,1178.75 1600,1178.28 1695.11,1178.28 1704.4,1169 v1(1944,1169) 2228.54,1169 2237.76,1178.21 2247,1178.21 ; TP4.1@1295,-38.24 1292.32,-35.57 v1(1292.32,13.81) 1292.32,59.32 1389,156 1784.42,156 1904.42,36 2090.76,36 v1(2122.76,4) ; v1(1509,411) v1(1636,411) ; 2247,1177.95 2348.9,1177.9 2382.01,1211.01 v1(2428,1211.01)
NetC1_1: C1.1 U4L.24 | length 102.9
  Top w10: C1.1@83.72,228.38 97.49,242.14 154.11,242.14 169.99,226.27 169.99,223.71 U4L.24@171.26,222.44
NetC1_2: C1.2 U4L.2 | length 70
  Top w10: C1.2@79.72,187.01 89.57,177.17 U4L.2@145.67,177.17
NetC2_1: C2.1 U4R.23 | length 60.3
  Top w10: U4R.23@2954.72,96.46 2954.72,77.28 C2.1@2983.77,48.23
NetC2_2: C2.2 U4R.1 | length 145.5
  Top w10: U4R.1@3000,122.05 3007.95,122.05 v2(3025,105)
  Top w15: C2.2@3017.69,35.23 3050.23,35.23 v1(3051,36)
  Bottom w10: v2(3025,105) 3051,79 v1(3051,36)
NetC3_1: C3.1 U4R.24 | length 101.8
  Top w10: U4R.24@2974.41,96.46 2988.87,82 3068.01,82 C3.1@3069.57,80.44
NetC3_2: C3.2 U4R.2 | length 78.6
  Top w10: U4R.2@3000,141.73 3027.31,141.73 3049.24,119.81 C3.2@3069.57,119.81
NetC22_2: C22.2 U4R.22 | length 52.5
  Top w10: C22.2@2924.69,48.23 2935.04,58.58 U4R.22@2935.04,96.46
NetC27_1: C27.1 U4L.23 | length 57.4
  Top w10: C27.1@183.07,276.57 190.94,268.7 U4L.23@190.94,222.44
NetC27_2: C27.2 U4L.1 | length 129.1
  Top w10: v2(111,268) 135.13,268 C27.2@143.7,276.57 ; v2(125,217.52) U4L.1@145.67,196.85 U4L.1@138.37,196.85
  Bottom w15: v2(111,268) 125,254 v2(125,217.52)
NetC28_2: C28.2 U4L.22 | length 63.3
  Top w10: U4L.22@210.63,222.44 210.63,249.34 235.24,273.94 C28.2@235.24,275.59
NetC30_1: C30.1 R21.1 TP13.1 U5.7 | length 166.1
  Top w10: C30.1@1714.74,1226.35 v1(1714.74,1260) 1714.74,1278.74 1729.13,1293.13 U5.7@1729.13,1300.28
  Top w15: R21.1@1671.25,1220.35 C30.1@1712.74,1220.35
  Bottom w10: TP13.1@1679.37,1237.31 1692.04,1237.31 v1(1714.74,1260)
NetC31_2: C31.2 R21.2 | length 0.7
  Top w15: C31.2@1623.44,1192.46 C31.2@1623.95,1192.98
NetC32_2: C32.2 D3.2 R24.2 TP16.1 U5.16 U5.17 | length 661.6
  Top w20: v2(1551.63,1292.46) 1582.99,1292.46 R24.2@1583.42,1292.89
  Bottom w10: TP16.1@2022,1627 2023,1626 v1(2023,1594)
  Bottom w20: v2(1551.63,1292.46) 1595.46,1292.46 1639,1336 1686.44,1336 1722.44,1300 1957.35,1300 1992,1334.65 v1(1992,1443.24)
NetD1L_4: D1L.4 U4L.13 | length 2615
  Top w10: U4L.13@295.28,98.43 319.57,98.43 337,81 v2(376.83,81)
  Top w15: v2(394.06,552) 394.06,616.06 462,684 v2@462,941.91 ; v2(1156.83,2150.84) D1L.4@1355.34,2150.84
  Bottom w15: v2(376.83,81) 378,81 448,151 448,223 394,277 v2@394,543 ; v2@461.5,941.29 v2(1156.83,2150.84)
  other v2: 461.91,942
NetD1L_5: D1L.5 U4L.18 | length 2372.4
  Top w10: U4L.18@295.28,196.85 295.28,339.52 310,354.25 310,492 323,505
  Top w15: 323,505 337,519 337,607.73 430,700.73 430,825.42 v2(428.64,826.78) ; v2@1164,2099 1359.97,2099 D1L.5@1376.01,2115.04
  Bottom w15: v2(428.64,826.78) v2(1160,2099)
NetD1L_6: D1L.6 U4L.19 | length 2319.9
  Top w10: U4L.19@269.68,222.44 269.68,351.69 287,369 287,472
  Top w15: 287,472 287,608 v2(399,720) ; 1175,2050 1367.44,2050 D1L.6@1396.68,2079.24
  Bottom w15: v2@399.97,719.21 400.07,719.38 v2(1165,2050)
NetD1R_4: D1R.4 U4R.13 | length 416.1
  Top w10: v2(2829,254) 2850.39,232.61 U4R.13@2850.39,220.47
  Top w15: D1R.4@2499.05,169.89 2556,226.85 v2(2556,242)
  Bottom w15: v2(2556,242) 2568,254 v2(2829,254)
NetD1R_5: D1R.5 U4R.18 | length 354.5
  Top w7: U4R.18@2848.35,120 U4R.18@2850.39,122.05
  Top w10: 2769,120 U4R.18@2848.35,120
  Top w15: D1R.5@2519.71,134.09 2519.71,139.48 2537.75,139.48 2549.27,151 2575,151 2606,120 2769,120